# Altium PCB Send_Medicine_Motor.PcbDoc (part 2 of 5)
Units mm, origin at the board's own origin, x right, y up, seen from the top; angles counter-clockwise.
Board outline 150.04 x 100.2 mm, 2 copper layers (Top Layer, Bottom Layer); 273 components, 158 nets, 892 pads, 508 vias.
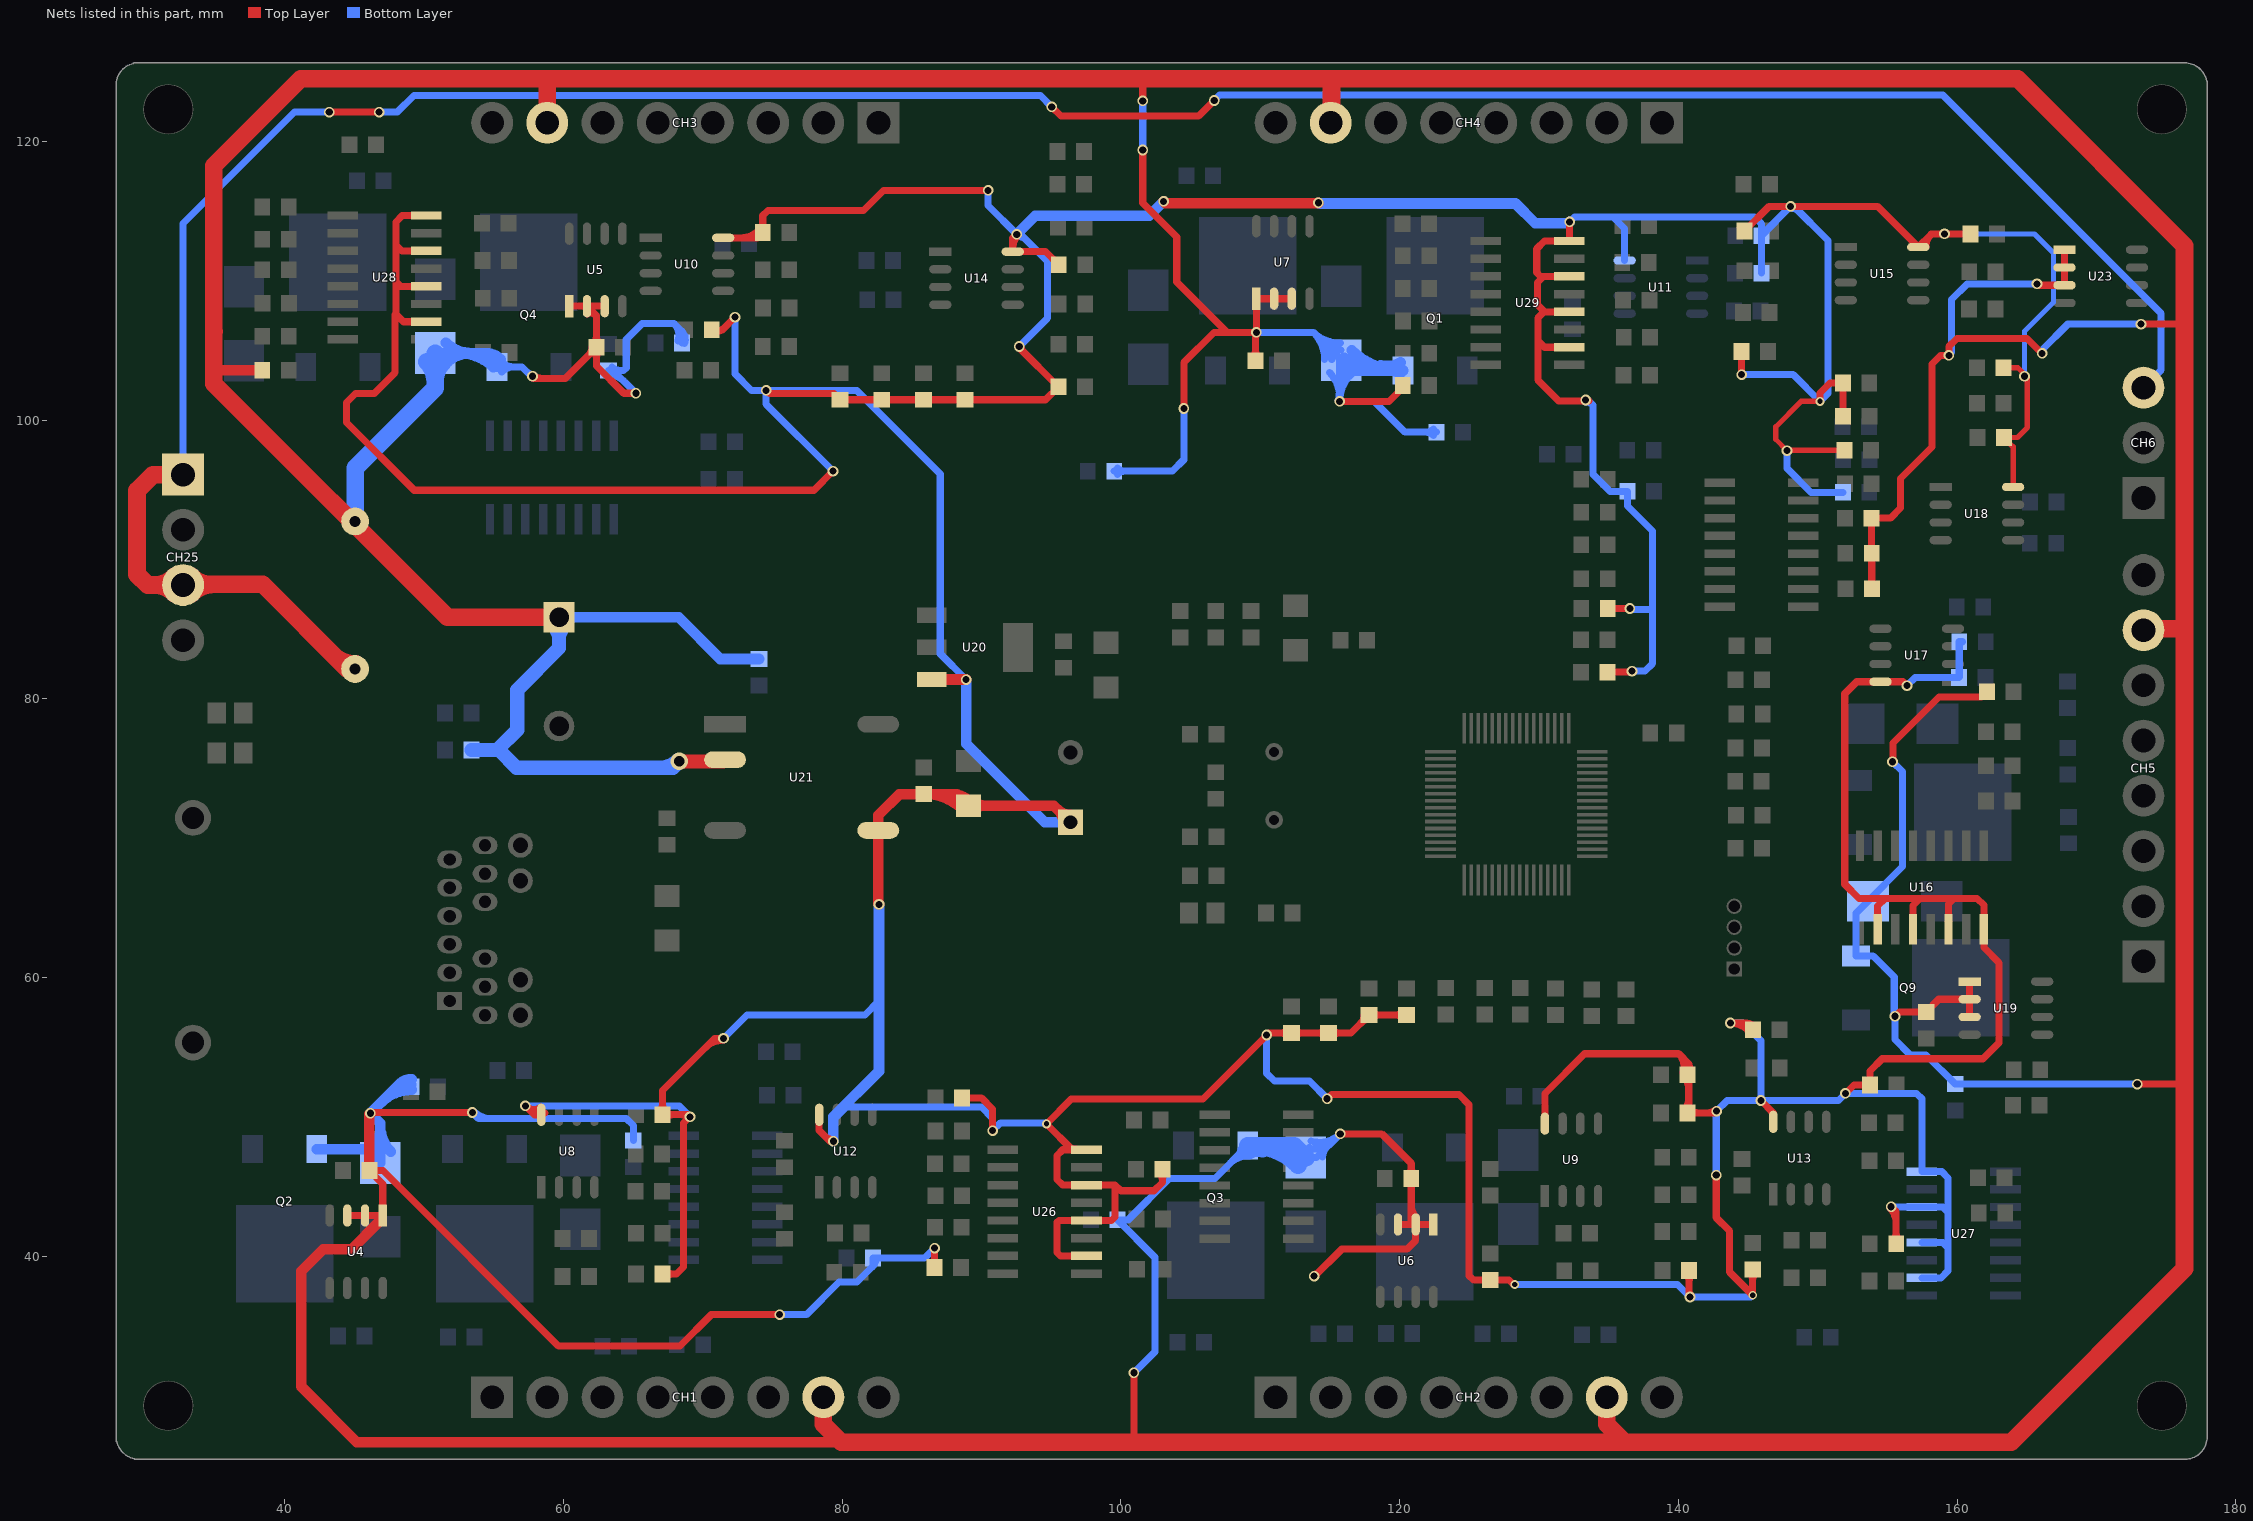
[diagram p2: the nets of this part, all layers, seen from the top]

## Via types
v1: diameter 0.762, hole 0.508, Top Layer to Bottom Layer, 415 vias
v2: diameter 1.27, hole 0.762, Top Layer to Bottom Layer, 47 vias
v3: diameter 0.635, hole 0.381, Top Layer to Bottom Layer, 43 vias
v4: diameter 3.4, hole 3.4, Top Layer to Bottom Layer, 2 vias
v5: diameter 0.6, hole 0.3, Top Layer to Bottom Layer, 1 vias

## Nets (pads, with @x,y where several pads share a name; then routed paths per layer and width w, separated by ;. In a path a pad name is that pad's centre, name@x,y a point inside that pad or via, vN(x,y) a via of type N, cw(c..) or ccw(c..) an arc to the next point about the centre after c; other vN are vias at no path point) (continued)
+5V: C1.2 C2.2 C3.2 C4.2 C5.2 C6.2 C7.2 C8.2 C11.2 C12.1 C14.1 C36.2 C83.2 R18.1 R19.1 R23.1 R37.1 R39.1 R41.1 R43.1 R63.1 R64.1 R67.1 R68.1 R78.1 R79.1 R81.1 R96.1 R97.1 R98.1 R99.1 R100.1 R101.1 R102.1 R103.1 R104.1 R105.1 R106.1 R107.1 R108.1 R109.1 R110.1 R111.1 U8.8 U9.8 U10.8 U11.8 U12.8 U13.8 U14.8 U15.8 U16.10 U16.12 U16.14 U16.16 U17.8 U18.8 U20.3 U21.5 U26.10 U26.12 U26.14 U26.16 U27.10 U27.12 U27.14 U27.16 U28.10 U28.12 U28.14 U28.16 U29.10 U29.12 U29.14 U29.16 | length 830.4
  Top Layer w0.381: v3(150.165,101.346) 148.819,101.346 146.99,99.517 146.99,98.628 147.777,97.841 R18.1@151.933,97.841 ; C36.2@163.332,103.759 164.363,103.759 165.049,103.073 165.049,99.466 164.338,98.755 R81.1@163.358,98.755 164.026,98.087 U18.8@164.026,95.199
  Top Layer w0.508: U28.10@50.168,107.061 48.539,107.061 47.981,107.62 ; U28.12@50.168,109.601 48.336,109.601 47.981,109.957 ; U28.14@50.168,112.141 48.412,112.141 47.981,112.573 ; U28.16@50.168,114.681 48.438,114.681 47.981,114.224 47.981,112.573 ; 57.71,50.367 ccw(c58.25,50.907) U8.8@58.681,50.277 ; U8.8@58.394,50.696 cw(c57.898,51.421) v1(57.277,50.8) 57.919,50.158 U8.8@58.42,50.158 ; C1.2@66.894,50.418 ccw(c66.354,50.958) 67.117,50.958 ccw(c67.88,50.958) C1.2@67.34,50.418 ; R37.1@67.117,38.735 68.123,38.735 68.631,39.243 68.631,49.555 v1(69.088,50.013) 68.936,50.165 C1.2@67.117,50.165 67.117,51.902 70.853,55.639 v1(71.488,55.639) ; R37.1@67.34,38.512 cw(c67.88,37.972) 67.88,38.735 cw(c67.88,39.498) R37.1@67.34,38.958 ; C1.2@67.34,49.942 cw(c67.88,49.402) 67.88,50.165 cw(c67.88,50.928) C1.2@67.34,50.388 ; 68.413,50.165 cw(c68.413,49.338) v1@68.998,49.923 ; 70.187,54.973 cw(c71.488,53.672) v1@71.488,55.512 ; R41.1@70.626,106.316 ccw(c70.755,107.458) 71.568,106.645 ; 71.399,106.477 v1(72.314,107.391) ; U10.8@71.469,113.081 C3.2@73.929,113.081 ; 72.7,113.081 ccw(c72.7,115.042) C3.2@74.087,113.655 ; C3.2@74.31,113.462 74.31,114.671 74.676,115.037 81.534,115.037 82.982,116.484 v1(90.475,116.484) ; v1(74.549,102.133) 74.778,101.905 79.416,101.905 R99.1@79.858,101.463 R102.1@82.846,101.463 R106.1@85.835,101.463 R110.1@88.824,101.463 94.595,101.463 R67.1@95.519,102.387 92.71,105.197 v1(92.71,105.283) ; U12.8@78.359,50.158 78.359,49.022 79.121,48.26 v1(79.375,48.26) ; 78.725,48.656 ccw(c79.375,49.307) v1@79.375,48.387 ; v1(79.35,96.342) 77.978,94.971 49.301,94.971 44.45,99.822 44.45,101.27 45.085,101.905 46.431,101.905 47.93,103.403 47.93,107.569 47.981,107.62 ; C5.2@88.605,51.359 90.018,51.359 90.805,50.571 v1(90.805,49.022) ; U14.8@92.246,112.337 cw(c93.53,112.337) v1@92.622,113.245 ; v1(92.532,113.335) 92.246,113.048 U14.8@92.246,112.09 94.605,112.09 C7.2@95.545,111.15 ; v1@92.837,105.283 ccw(c93.352,105.283) 92.988,104.919 ; 96.287,47.884 ccw(c96.739,48.336) U26.16@96.739,47.696 ; U26.10@97.539,40.03 95.682,40.03 95.428,40.284 95.428,42.443 95.555,42.57 U26.12@97.539,42.57 99.339,42.57 99.593,42.824 99.593,45.11 ; U26.16@97.539,47.65 U26.16@96.52,47.65 ; R63.1@102.758,46 cw(c102.219,45.461) 102.982,45.461 cw(c103.745,45.461) R63.1@103.205,46 ; R63.1@102.982,46.253 102.982,45.298 102.387,44.704 100,44.704 99.593,45.11 ; R109.1@111.989,55.799 ccw(c111.45,55.259) 111.45,56.022 ccw(c111.45,56.785) R109.1@111.989,56.246 ; R109.1@112.496,55.799 cw(c113.035,55.259) 113.035,56.022 cw(c113.035,56.785) R109.1@112.496,56.246 ; R104.1@114.656,55.799 ccw(c114.117,55.259) 114.117,56.022 ccw(c114.117,56.785) R104.1@114.656,56.246 ; v1(114.808,51.308) 115.113,51.613 124.257,51.613 124.993,50.876 124.993,38.608 125.308,38.293 R98.1@126.517,38.293 127.848,38.293 128.168,37.973 v3(128.27,37.973) ; R104.1@115.163,55.799 cw(c115.702,55.259) 115.702,56.022 cw(c115.702,56.785) R104.1@115.163,56.246 ; 117.215,56.727 ccw(c116.624,57.318) R97.1@117.459,57.318 ; R97.1@117.287,56.799 cw(c117.775,56.311) R97.1@117.775,57.002 ; R97.1@118.059,57.094 cw(c118.598,56.555) 118.598,57.318 cw(c118.598,58.08) R97.1@118.059,57.541 ; R96.1@120.244,57.094 ccw(c119.705,56.555) 119.705,57.318 ccw(c119.705,58.08) R96.1@120.244,57.541 ; R96.1@120.498,57.318 R97.1@117.805,57.318 116.51,56.022 R104.1@114.91,56.022 R109.1@112.243,56.022 110.632,56.022 105.893,51.283 96.444,51.283 v3(94.666,49.505) U26.16@96.52,47.65 ; U9.8@130.429,49.523 130.429,51.689 133.274,54.534 140.03,54.534 ; U29.10@132.184,105.232 130.404,105.232 129.921,105.715 ; U29.12@132.184,107.772 130.404,107.772 ; U29.14@132.184,110.312 130.327,110.312 ; v1(132.207,114.224) 132.184,114.201 U29.16@132.184,112.852 130.404,112.852 129.845,112.293 129.845,110.592 130.124,110.312 130.327,110.312 ; v1(133.35,101.448) 133.502,101.448 133.579,101.371 131.42,101.371 129.921,102.87 129.921,105.715 ; R79.1@134.91,81.915 136.601,81.915 v1(136.677,81.991) ; R19.1@134.935,86.487 v1(136.525,86.487) ; R101.1@140.351,53.166 ccw(c139.088,53.592) 140.03,54.534 ; C2.2@140.427,50.545 ccw(c139.642,51.33) 140.752,51.33 ; R101.1@140.427,52.782 cw(c139.642,51.997) 140.752,51.997 ; R101.1@140.484,53.334 ccw(c140.19,53.812) 140.752,53.812 ; R39.1@140.554,38.736 cw(c140.014,38.196) 140.777,38.196 cw(c141.54,38.196) R39.1@141,38.736 ; 140.609,53.955 cw(c139.954,53.3) R101.1@140.832,53.004 ; 140.777,37.55 ccw(c141.309,37.55) v1@140.933,37.174 ; R39.1@140.777,38.989 140.777,37.15 v1(140.843,37.084) ; C2.2@140.873,50.069 cw(c141.413,49.529) 141.413,50.292 cw(c141.413,51.055) C2.2@140.873,50.515 ; 142.135,50.292 ccw(c142.135,51.032) v1@142.658,50.509 ; v1(142.723,45.822) 142.723,42.774 143.688,41.808 143.688,38.862 v3(145.339,37.211) R105.1@145.339,39.055 ; v1(142.748,50.419) 142.621,50.292 C2.2@140.65,50.292 140.752,50.394 140.752,53.812 ; v1(144.541,103.266) R68.1@144.541,104.927 ; C4.2@144.744,113.563 146.522,115.341 v1(148.057,115.341) 154.298,115.341 U15.8@157.219,112.42 158.159,113.36 v1(159.106,113.36) C8.2@160.975,113.36 ; R108.1@144.806,56.744 cw(c144.806,55.846) R108.1@145.503,56.412 ; R108.1@145.109,56.092 ccw(c143.739,54.978) v1(143.739,56.744) 144.871,56.744 R108.1@145.354,56.261 ; R105.1@145.115,38.832 cw(c144.576,38.292) 145.339,38.292 cw(c146.102,38.292) R105.1@145.562,38.832 ; v1(145.923,51.181) 146.812,50.292 U13.8@146.812,49.65 ; 146.633,50.471 cw(c146.312,50.15) U13.8@146.766,50.15 ; v3(150.165,101.346) 150.165,101.956 150.876,102.667 R111.1@151.806,102.667 151.831,102.641 R107.1@151.831,100.279 ; v1(151.994,51.689) 152.603,52.299 C6.2@153.761,52.299 153.761,53.304 154.635,54.178 161.874,54.178 163.017,55.321 163.017,61.062 161.925,62.154 U16.16@161.925,63.472 161.925,65.202 161.442,65.684 159.791,65.684 ; U16.10@154.305,63.472 154.305,65.126 154.864,65.684 ; v1@155.18,43.471 cw(c154.08,42.371) 155.636,42.371 ; v1@155.264,43.434 cw(c155.245,43.044) 155.636,43.044 ; v1(155.27,43.561) 155.636,43.195 R64.1@155.636,40.894 ; R64.1@155.413,41.147 ccw(c154.873,41.687) 155.636,41.687 ccw(c156.399,41.687) R64.1@155.859,41.147 ; v1(156.413,80.95) 156.134,81.229 U17.8@154.515,81.229 152.806,81.229 151.943,80.366 151.943,66.7 152.959,65.684 154.864,65.684 ; U16.12@156.845,63.472 156.845,65.176 157.353,65.684 ; U15.8@157.154,112.485 cw(c157.089,112.42) U15.8@157.181,112.42 ; U15.8@157.257,112.42 cw(c157.349,112.42) U15.8@157.284,112.485 ; U15.8@157.765,112.42 cw(c159.083,112.42) 158.151,113.352 ; U16.14@159.385,63.472 159.385,65.278 159.791,65.684 ; 47.981,107.62 47.981,109.957 ; 47.981,109.957 47.981,112.573 ; U26.16@96.52,47.65 95.834,47.65 95.428,47.244 95.428,45.517 95.834,45.11 U26.14@97.539,45.11 99.593,45.11 ; 129.921,105.715 129.921,107.34 130.353,107.772 130.404,107.772 ; 130.327,110.312 129.896,109.88 129.896,108.28 130.404,107.772 ; 140.03,54.534 140.752,53.812 ; 154.864,65.684 157.353,65.684 ; 157.353,65.684 159.791,65.684
  Top Layer w0.762: v1(82.652,65.253) 82.603,65.302 U21.5@82.603,70.561 82.603,71.655 84.115,73.167 C11.2@85.852,73.167 88.25,73.167 ; C11.2@85.968,73.167 cw(c85.968,69.329) C14.1@88.682,72.043 ; U20.3@86.435,81.393 88.889,81.393 v1(88.9,81.382) ; 87.807,73.167 cw(c87.807,71.169) C14.1@89.22,72.582 ; C14.1@88.433,72.984 ccw(c88.978,73.529) C14.1@88.978,72.758 ; C14.1@88.559,72.361 ccw(c87.5,72.417) 88.25,73.167 ; C14.1@89.474,72.043 cw(c90.189,71.328) 90.189,72.339 cw(c90.189,73.351) C14.1@89.474,72.636 ; C12.1@95.874,71.145 ccw(c94.621,71.145) 95.507,72.031 ccw(c96.393,72.917) C12.1@96.393,71.664 ; C12.1@96.393,71.145 95.199,72.339 C14.1@89.078,72.339 88.25,73.167 ; v1(103.073,115.697) 103.2,115.57 114.148,115.57 v1(114.173,115.595)
  Bottom Layer w0.381: v1(159.106,113.36) 165.557,113.36 166.929,111.989 166.929,108.458 164.846,106.375 v1(164.846,103.149)
  Bottom Layer w0.508: v1(57.277,50.8) 57.302,50.775 68.326,50.775 v1(69.088,50.013) ; v1(71.488,55.639) 73.177,57.328 81.636,57.328 82.652,58.344 ; v1(72.314,107.391) 72.314,103.327 73.508,102.133 v1(74.549,102.133) ; v1(79.35,96.342) 74.549,101.143 v1(74.549,102.133) ; 79.375,49.784 80.315,50.724 89.992,50.724 90.805,49.911 v1(90.805,49.022) 91.364,49.581 94.59,49.581 v3(94.666,49.505) ; v1(88.9,81.382) 87.046,83.236 87.046,96.139 81.051,102.133 v1(74.549,102.133) ; v1(90.475,116.484) 90.475,115.392 v1(92.532,113.335) 92.812,113.335 94.742,111.404 94.742,107.315 v1(92.71,105.283) ; v1@92.532,113.208 cw(c92.532,112.227) 93.226,112.92 ; 94.329,49.581 cw(c94.329,49.167) v3@94.621,49.46 ; v1(110.465,55.88) 110.465,53.137 111.023,52.578 113.538,52.578 v1(114.808,51.308) ; v3@128.168,37.973 139.954,37.973 v1(140.843,37.084) 145.212,37.084 v3(145.339,37.211) ; v1(132.207,114.224) 132.563,114.579 135.331,114.579 ; v1@133.35,101.321 cw(c133.35,100.646) 133.827,101.123 ; v1(133.35,101.448) 133.502,101.448 133.883,101.067 133.883,96.114 135.103,94.894 R103.1@136.362,94.894 136.362,93.838 138.151,92.05 138.151,86.411 ; U11.8@136.151,111.455 136.151,113.76 135.331,114.579 ; v1(136.525,86.487) 136.601,86.411 138.151,86.411 ; v1(136.677,81.991) 137.617,81.991 138.151,82.525 138.151,86.411 ; v1(142.723,45.822) 142.723,50.394 v1(142.748,50.419) 143.51,51.181 v1(145.923,51.181) ; v1(143.739,56.744) 144.653,56.744 145.923,55.474 v1(145.923,51.181) ; v1(144.541,103.266) 148.245,103.266 v3(150.165,101.346) 150.749,101.93 150.749,112.878 148.285,115.341 v1(148.057,115.341) R100.1@145.984,113.269 ; 144.879,37.084 ccw(c144.879,37.671) v3@145.294,37.256 ; R100.1@145.959,113.259 145.959,114.087 145.466,114.579 135.331,114.579 ; R43.1@145.984,110.566 R100.1@145.984,113.233 ; v1(147.803,97.815) 147.803,96.545 149.53,94.818 R78.1@151.806,94.818 ; v1@148.057,115.214 cw(c148.057,114.356) 148.664,114.963 ; v1(155.27,43.561) 155.296,43.536 U27.14@157.477,43.536 158.979,43.536 159.36,43.155 ; v1(156.413,80.95) 156.997,81.534 C83.2@160.137,81.534 160.162,81.559 R23.1@160.162,84.099 R23.1@160.376,84.099 ; U27.10@157.477,38.456 158.852,38.456 159.36,38.964 159.36,40.615 ; U27.12@157.477,40.996 158.979,40.996 159.36,40.615 ; v1(145.923,51.181) 151.486,51.181 v1(151.994,51.689) 157.099,51.689 157.477,51.311 U27.16@157.477,46.076 158.902,46.076 159.36,45.618 159.36,43.155 ; 159.36,40.615 159.36,43.155
  Bottom Layer w0.762: v1(79.375,48.26) 79.375,49.784 79.375,50.013 82.652,53.289 82.652,58.344 v1(82.652,65.253) ; v1(88.9,81.382) 88.9,76.784 94.539,71.145 C12.1@96.393,71.145 ; v1(92.532,113.335) 93.853,114.656 102.032,114.656 v1(103.073,115.697) ; v1(114.173,115.595) 114.224,115.545 128.321,115.545 129.731,114.134 132.117,114.134 v1(132.207,114.224)
+24V: C10.1 C13.2 CH1.7 CH2.7 CH3.7 CH4.7 CH5.7 D1.2 D2.2 D3.2 D4.2 D9.2 F1.2 Q1.3 Q2.3 Q3.3 Q4.3 Q9.3 R1.2 R2.2 R5.2 R6.2 R7.2 R8.2 R13.2 R14.2 R15.2 R16.2 R21.2 R26.2 R61.1 R62.1 R65.1 R66.1 R83.1 R86.2 R88.2 R95.2 R112.2 R113.2 U4.1 U4.2 U4.3 U5.1 U5.2 U5.3 U6.1 U6.2 U6.3 U7.1 U7.2 U7.3 U19.1 U19.2 U19.3 U21.2 U23.1 U23.2 U23.3 | length 969.5
  Top Layer w0.508: U4.3@44.501,42.926 U4.2@45.771,42.926 U4.1@46.761,42.926 ; v1(46.152,50.267) 46.203,50.317 v1(53.467,50.317) ; v1@46.242,50.177 cw(c46.581,49.837) 46.581,50.317 ; U4.1@46.761,42.469 U4.1@46.761,42.926 ; v1(57.785,103.149) 57.785,103.251 57.76,103.276 57.76,103.099 57.861,102.997 60.137,102.997 R2.2@62.372,105.232 ; v1@57.875,103.239 ccw(c58.46,103.824) 58.46,102.997 ; U5.1@60.427,108.179 U5.2@61.697,108.179 ; U5.2@61.522,108.106 cw(c61.63,107.843) U5.2@61.831,108.044 ; U5.2@61.714,107.636 cw(c61.943,107.074) 62.372,107.503 ; 61.782,104.642 cw(c62.372,104.051) R2.2@62.372,104.886 ; R2.2@61.854,104.714 ccw(c61.366,105.202) R2.2@62.056,105.202 ; R2.2@62.149,104.979 cw(c61.609,104.439) 62.372,104.439 cw(c63.135,104.439) R2.2@62.596,104.979 ; R2.2@62.149,105.486 ccw(c61.609,106.025) 62.372,106.025 ccw(c63.135,106.025) R2.2@62.596,105.486 ; U5.3@62.967,108.179 U5.2@61.697,108.179 ; v1(65.202,101.93) 64.338,101.93 62.372,103.896 R2.2@62.372,105.232 ; v1(75.514,35.814) 70.612,35.814 68.377,33.579 59.639,33.579 47.066,46.152 R1.2@46.086,46.152 47.041,45.197 U4.1@47.041,42.926 U4.1@46.761,42.926 ; R61.1@86.629,39.192 86.629,40.579 v1(86.639,40.589) ; 100.559,124.46 100.584,124.485 ; v1(100.94,31.648) 100.94,26.949 101.219,26.67 ; 101.321,124.485 101.575,124.231 v1(101.575,122.911) ; v1(101.575,119.38) 101.575,115.57 104.013,113.132 104.013,109.921 107.635,106.299 ; v1(104.521,100.838) 104.521,104.14 106.68,106.299 107.635,106.299 ; R26.2@109.444,104.52 ccw(c108.904,105.06) 109.667,105.06 ccw(c110.43,105.06) R26.2@109.89,104.52 ; R26.2@109.667,104.267 109.667,106.238 v1(109.728,106.299) ; 109.667,105.845 cw(c110.182,105.845) v1@109.818,106.209 ; U7.3@112.268,108.712 U7.2@110.998,108.712 U7.1@109.728,108.712 v1(109.728,106.299) ; v1(113.868,38.583) 113.868,38.532 115.849,40.513 120.523,40.513 121.158,41.148 U6.2@121.158,42.291 ; v1@113.868,38.71 ccw(c113.868,39.139) 114.172,38.835 ; v1(115.697,101.346) 119.253,101.346 120.132,102.225 R66.1@120.132,102.295 ; v1(115.748,48.793) 118.72,48.793 120.838,46.675 R21.2@120.838,45.593 120.838,42.352 U6.2@120.899,42.291 ; U6.3@119.888,42.291 U6.2@120.899,42.291 ; R66.1@119.959,102.468 R66.1@120.132,102.641 ; R21.2@120.615,45.34 cw(c120.075,44.8) 120.838,44.8 cw(c121.601,44.8) R21.2@121.061,45.34 ; R21.2@120.615,45.846 ccw(c120.075,46.386) 120.838,46.386 ccw(c121.601,46.386) R21.2@121.061,45.846 ; 120.838,42.621 ccw(c121.127,42.621) U6.2@121.075,42.337 ; 120.838,43.23 ccw(c121.238,43.23) U6.2@121.166,42.836 ; 120.838,43.675 ccw(c122.042,43.675) U6.2@121.191,42.824 ; U6.1@122.428,42.291 U6.2@121.158,42.291 ; R113.2@153.909,87.909 153.883,87.935 R112.2@153.883,90.449 153.858,90.475 R88.2@153.858,92.964 155.219,92.964 155.956,93.701 155.956,95.809 158.217,98.069 158.217,104.038 158.826,104.648 v1(159.41,104.648) 159.41,105.283 159.995,105.867 165.024,105.867 v1(166.103,104.788) ; v1@155.397,75.514 155.397,76.835 158.699,80.137 161.762,80.137 R83.1@162.143,80.518 ; v1(155.55,57.226) 155.865,57.541 R86.2@157.785,57.541 158.689,58.445 U19.2@160.909,58.445 ; U19.3@160.909,57.175 U19.2@160.909,58.445 ; U19.1@160.909,59.715 U19.2@160.909,58.445 ; v1(165.735,109.779) 165.837,109.677 U23.3@167.716,109.677 U23.2@167.716,110.947 U23.1@167.716,112.217 ; v1(172.933,52.36) 176.317,52.36 176.327,52.349 ; v1(173.203,106.883) 176.301,106.883 176.327,106.858 ; U5.2@61.697,108.179 62.372,107.503 ; R2.2@62.372,105.232 62.372,107.503 ; 107.635,106.299 v1(109.728,106.299) ; U6.2@120.899,42.291 U6.2@121.158,42.291
  Top Layer w0.762: 34.925,103.657 35.001,103.581 R65.1@38.395,103.581 ; R1.2@46.086,46.152 46.086,50.201 v1(46.152,50.267) ; U4.1@46.761,42.469 44.806,40.513 42.774,40.513 41.199,38.938 41.199,30.658 45.187,26.67 79.934,26.67 ; 134.62,124.485 134.865,124.24
  Top Layer w1.016: 34.925,106.197 35.077,106.35 ; v2(68.326,75.514) 71.476,75.514 U21.2@71.603,75.641
  Top Layer w1.27: CH3.7@58.848,121.336 58.848,124.286 ; C10.1@59.69,85.852 51.689,85.852 34.925,102.616 34.925,103.657 34.925,106.197 34.925,118.262 41.148,124.485 100.584,124.485 101.321,124.485 115.113,124.485 ; CH1.7@78.656,29.896 78.656,27.947 79.934,26.67 101.219,26.67 136.144,26.67 ; CH4.7@115.058,121.336 115.113,121.39 115.113,124.485 ; CH2.7@134.867,29.896 134.867,27.947 136.144,26.67 ; CH5.7@173.38,84.93 173.489,85.039 176.327,85.039 ; 115.113,124.485 134.62,124.485 164.363,124.485 176.327,112.522 176.327,106.858 176.327,85.039 ; 136.144,26.67 163.881,26.67 176.327,39.116 176.327,52.349 176.327,85.039
  Bottom Layer w0.508: v1(53.467,50.317) 53.899,49.886 64.516,49.886 65.024,49.378 R14.2@65.024,48.321 ; v1@53.557,50.407 ccw(c54.816,51.666) 54.816,49.886 ; Q4.3@55.231,103.819 57.039,103.819 57.76,103.099 57.76,103.276 57.785,103.251 v1(57.785,103.149) ; Q4.3@55.582,103.468 cw(c56.428,102.622) 56.428,103.819 cw(c56.428,105.016) Q4.3@55.582,104.17 ; 57.438,103.42 ccw(c57.785,103.767) v1@57.785,103.276 ; R8.2@63.246,103.571 R8.2@63.561,103.571 ; R8.2@63.276,103.255 cw(c63.276,101.804) 64.302,102.83 ; R8.2@63.499,103.348 cw(c64.039,102.808) 64.039,103.571 cw(c64.039,104.334) R8.2@63.499,103.794 ; v1(65.202,101.93) R8.2@63.561,103.571 ; R16.2@68.218,105.678 ccw(c67.105,106.094) 67.945,106.934 ; R16.2@68.291,105.79 ccw(c67.751,106.33) 68.514,106.33 ccw(c69.277,106.33) R16.2@68.737,105.79 ; 68.504,106.375 cw(c67.918,105.79) R16.2@68.694,105.5 ; R16.2@68.514,105.537 68.514,106.365 67.945,106.934 ; v1(75.514,35.814) 77.445,35.814 79.781,38.151 81.077,38.151 82.23,39.304 R15.2@82.23,39.878 85.928,39.878 v1(86.639,40.589) ; 82.173,39.247 ccw(c81.572,39.848) R15.2@82.422,39.848 ; R13.2@99.527,96.342 103.708,96.342 104.521,97.155 v1(104.521,100.838) ; R13.2@99.751,96.119 cw(c100.29,95.579) 100.29,96.342 cw(c100.29,97.105) R13.2@99.751,96.566 ; v1(100.94,31.648) 102.438,33.147 102.438,39.939 R7.2@99.756,42.621 100.533,42.621 103.505,45.593 106.754,45.593 Q3.3@109.107,47.946 ; v1(101.575,119.38) v1(101.575,122.911) ; 107.833,46.672 cw(c109.107,45.399) Q3.3@109.107,47.2 ; Q3.3@108.437,47.276 ccw(c108.017,47.696) Q3.3@108.611,47.696 ; v1(109.728,106.299) 113.826,106.299 ; D3.2@113.284,47.083 114.037,47.083 v1(115.748,48.793) cw(c114.265,50.276) D3.2@113.641,48.275 ; D3.2@113.489,47.79 ccw(c113.983,49.371) 115.154,48.2 ; D3.2@114.48,47.133 cw(c115.428,47.133) 114.758,47.803 ; D1.2@114.628,104.355 ccw(c111.89,104.363) 113.826,106.299 ; D1.2@114.64,105.485 ccw(c115.722,106.567) D1.2@115.792,105.038 ; D1.2@114.69,105.435 cw(c113.612,104.358) D1.2@115.136,104.353 ; D1.2@114.978,103.405 cw(c113.243,101.67) v1@115.697,101.67 ; v1@115.587,101.409 ccw(c115.073,101.706) 115.646,101.86 ; v1@115.697,101.343 cw(c118.358,101.343) D1.2@116.61,103.349 ; 115.697,102.46 cw(c117.385,102.46) D1.2@116.276,103.732 ; D1.2@115.769,105.546 cw(c115.651,108.124) 113.826,106.299 ; R5.2@122.423,98.913 ccw(c121.884,98.373) 121.884,99.136 ccw(c121.884,99.899) R5.2@122.423,99.36 ; R5.2@122.646,99.136 120.396,99.136 118.186,101.346 v1(115.697,101.346) 115.697,104.174 D1.2@115.824,104.301 113.826,106.299 ; v1(155.372,75.489) 156.083,74.778 156.083,67.962 D9.2@153.602,65.481 152.765,64.644 Q9.3@152.765,61.558 153.986,61.558 155.499,60.046 155.499,57.277 v1(155.55,57.226) 155.55,55.55 156.642,54.458 157.77,54.458 R62.1@159.868,52.36 v1(172.933,52.36) ; v1(159.41,104.648) 159.614,104.851 159.614,108.661 160.731,109.779 v1(165.735,109.779) ; v1(166.103,104.788) 166.103,105.042 167.945,106.883 v1(173.203,106.883) ; R8.2@63.561,103.571 64.328,103.571 64.516,103.759 64.516,105.791 65.659,106.934 67.945,106.934
  Bottom Layer w0.762: Q2.3@42.305,47.692 45.873,47.692 D2.2@46.863,46.702 46.863,49.555 v1(46.152,50.267) 48.209,52.324 R6.2@49.088,52.324 ; D2.2@46.107,47.508 ccw(c44.282,49.333) 46.863,49.333 ccw(c49.444,49.333) D2.2@47.619,47.508 ; 46.936,51.051 cw(c49.113,48.873) R6.2@49.113,51.953 ; 48.237,52.351 cw(c49.113,51.475) R6.2@49.113,52.715 ; 48.362,52.324 cw(c48.362,51.45) R6.2@48.98,52.068 ; D4.2@50.8,104.809 54.241,104.809 ; D4.2@51.556,104.053 cw(c53.381,102.228) 53.381,104.809 cw(c53.381,107.39) D4.2@51.556,105.565 ; 52.554,104.809 cw(c52.554,101.392) Q4.3@54.97,103.808 ; 54.393,104.809 cw(c54.393,103.231) Q4.3@55.509,104.347 ; Q4.3@55.211,104.437 cw(c55.142,105.71) 54.241,104.809 ; Q4.3@55.231,103.819 54.241,104.809 ; C10.1@59.69,85.852 68.275,85.852 71.262,82.865 C13.2@74.041,82.865 ; D1.2@115.824,104.301 116.56,103.565 Q1.3@120.255,103.565 ; D1.2@116.041,104.468 ccw(c118.221,106.648) 118.221,103.565 ; D1.2@116.58,105.007 ccw(c120.061,108.488) Q1.3@120.061,103.565 ; 118.639,103.946 ccw(c119.127,105.769) Q1.3@120.071,104.135 ; Q1.3@119.994,103.304 ccw(c119.364,102.674) 119.364,103.565 ccw(c119.364,104.456) Q1.3@119.994,103.826
  Bottom Layer w1.016: R95.2@53.401,76.327 55.245,76.327 ; C10.1@59.69,84.861 59.69,83.642 56.693,80.645 56.693,77.775 55.245,76.327 ; 66.916,75.057 ccw(c66.916,76.925) v2@68.236,75.604 ; v2(68.326,75.514) 67.869,75.057 56.642,75.057 55.372,76.327 55.245,76.327
  Bottom Layer w1.27: F1.2@45.06,92.659 F1.2@45.06,92.735 45.06,96.571 50.8,102.311 D4.2@50.8,104.809 ; D4.2@50.224,104.183 cw(c48.832,102.791) 50.8,102.791 cw(c52.768,102.791) D4.2@51.376,104.183 ; C10.1@59.69,84.861 C10.1@59.69,85.852 ; Q3.3@109.107,47.946 112.421,47.946 D3.2@113.284,47.083 ; Q3.3@109.165,47.596 cw(c109.825,46.453) 110.166,47.728 ; Q3.3@109.354,47.946 cw(c109.354,43.203) D3.2@112.708,46.557
+24V_IN: CH6.3 CH25.1 CH25.3 F1.1 | length 213.9
  Top Layer w0.508: v1(43.205,122.098) v1(46.787,122.098) ; v1(95.047,122.479) 95.707,121.818 105.588,121.818 v1(106.705,122.936)
  Top Layer w1.27: CH25.3@32.104,87.557 ccw(c30.627,86.08) 30.627,88.168 ccw(c30.627,90.256) CH25.3@32.104,88.78 ; CH25.1@32.715,96.088 30.556,96.088 29.413,94.945 29.413,88.925 30.17,88.168 CH25.3@32.715,88.168 32.766,88.219 38.425,88.219 44.501,82.144 F1.1@45.06,82.144 ; CH25.3@33.327,87.557 cw(c34.926,85.957) 34.926,88.219 ; CH25.3@33.327,88.78 ccw(c34.681,90.134) 34.681,88.219 ; 43.483,83.162 ccw(c45.06,84.739) F1.1@45.06,82.509
  Bottom Layer w0.508: CH25.1@32.715,96.088 32.715,114.097 40.716,122.098 v1(43.205,122.098) ; v1(46.787,122.098) 48.082,122.098 49.276,123.292 94.234,123.292 v1(95.047,122.479) ; v1(106.705,122.936) 107.086,123.317 158.979,123.317 174.65,107.645 174.65,103.602 CH6.3@173.38,102.332